# Altium PCB mega128PCB.PcbDoc (part 2 of 3)
Units mm, origin at the board's own origin, x right, y up, seen from the top; angles counter-clockwise.
Board outline 152.4 x 101.6 mm, 2 copper layers (Top Layer, Bottom Layer); 70 components, 96 nets, 393 pads, 80 vias.
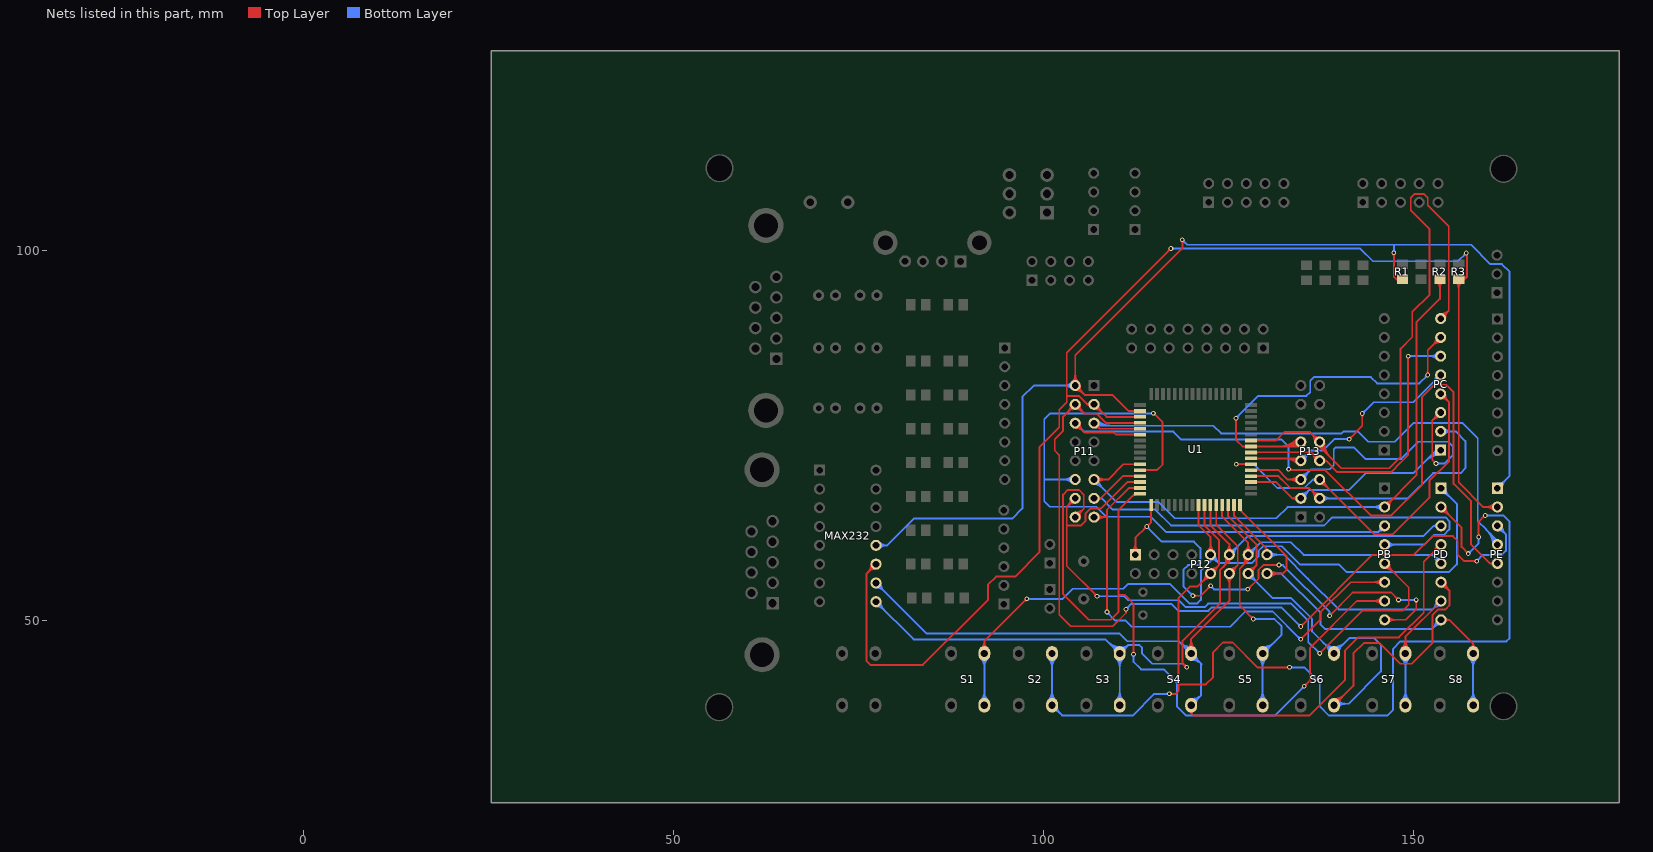
[diagram p2: the nets of this part, all layers, seen from the top]

## Via types
v1: diameter 0.635, hole 0.356, Top Layer to Bottom Layer, 80 vias

## Nets (pads, with @x,y where several pads share a name; then routed paths per layer and width w, separated by ;. In a path a pad name is that pad's centre, name@x,y a point inside that pad or via, vN(x,y) a via of type N, cw(c..) or ccw(c..) an arc to the next point about the centre after c; other vN are vias at no path point) (continued)
PB1: P11.11 PB.2 R2.1 U1.11 | length 100.5
  Top Layer w0.254: P11.11@106.858,69.088 108.756,69.088 110.82,71.152 U1.11@113.074,71.152 ; P11.11@107.119,68.827 cw(c107.749,68.197) 107.749,69.088 cw(c107.749,69.979) P11.11@107.119,69.349 ; P11.11@107.298,68.647 cw(c108.362,67.584) 108.362,69.088 cw(c108.362,70.592) P11.11@107.298,69.529 ; U1.11@112.437,71.065 ccw(c112.227,70.855) 112.227,71.152 ccw(c112.227,71.449) U1.11@112.437,71.239 ; PB.2@146.124,65.374 150.419,69.669 150.419,90.322 153.594,93.497 R2.1@153.594,96.139 ; PB.2@146.124,65.743 ccw(c146.124,66.634) 146.754,66.004 ccw(c147.384,65.374) PB.2@146.493,65.374 ; PB.2@146.124,65.997 ccw(c146.124,67.501) 147.187,66.438 ccw(c148.251,65.374) PB.2@146.747,65.374 ; R2.1@153.224,95.769 cw(c152.331,94.876) 153.594,94.876 cw(c154.856,94.876) R2.1@153.964,95.769
  Bottom Layer w0.254: P11.11@106.858,68.465 cw(c106.858,66.961) 107.921,68.024 cw(c108.985,69.088) P11.11@107.481,69.088 ; P11.11@106.858,68.719 cw(c106.858,67.828) 107.488,68.458 cw(c108.118,69.088) P11.11@107.227,69.088 ; P11.11@106.858,69.088 109.907,66.038 115.597,66.038 117.78,63.856 131.496,63.856 133.014,65.374 PB.2@146.124,65.374 ; PB.2@145.683,64.933 ccw(c144.62,63.87) 144.62,65.374 ccw(c144.62,66.878) PB.2@145.683,65.815 ; PB.2@145.863,65.113 ccw(c145.233,64.483) 145.233,65.374 ccw(c145.233,66.265) PB.2@145.863,65.635
PB2: P11.12 PB.3 U1.12 | length 96.5
  Top Layer w0.254: U1.12@113.074,70.352 115.361,70.352 116.129,71.12 116.129,76.835 v1@114.935,78.029 ; U1.12@113.711,70.265 cw(c113.921,70.055) 113.921,70.352 cw(c113.921,70.649) U1.12@113.711,70.439 ; v1@114.884,77.838 cw(c114.884,77.256) 115.296,77.668 ; v1@115.075,78.029 ccw(c115.412,78.029) 115.173,77.79
  Bottom Layer w0.254: 100.127,69.088 P11.12@104.318,69.088 ; P11.12@103.877,68.647 ccw(c102.814,67.584) 102.814,69.088 ccw(c102.814,70.592) P11.12@103.877,69.529 ; P11.12@104.057,68.827 ccw(c103.427,68.197) 103.427,69.088 ccw(c103.427,69.979) P11.12@104.057,69.349 ; v1@114.749,77.894 ccw(c114.424,77.569) 114.424,78.029 ccw(c114.424,78.489) v1@114.749,78.164 ; v1(114.884,78.029) 100.94,78.029 100.127,77.216 100.127,66.167 100.889,65.405 107.163,65.405 108.504,64.064 114.536,64.064 114.988,63.612 115.001,63.612 116.637,61.976 145.266,61.976 ; PB.3@145.509,62.733 cw(c144.651,62.591) 145.266,61.976 ; PB.3@146.023,62.219 ccw(c145.881,61.361) 145.266,61.976 ; PB.3@146.124,62.834 145.266,61.976
PB3: P11.13 PB.4 U1.13 | length 74.5
  Top Layer w0.254: P11.13@106.858,66.548 107.74,66.548 ; P11.13@107.445,66.34 cw(c107.74,66.235) 107.74,66.548 ; P11.13@107.445,66.756 ccw(c107.74,66.861) 107.74,66.548 ; U1.13@112.437,69.465 ccw(c112.227,69.255) 112.227,69.552 ccw(c112.227,69.849) U1.13@112.437,69.639 ; U1.13@113.074,69.552 110.744,69.552 107.74,66.548
  Bottom Layer w0.254: P11.13@106.858,66.548 107.874,66.548 ; P11.13@107.413,66.265 cw(c107.874,66.031) 107.874,66.548 ; P11.13@107.413,66.831 ccw(c107.874,67.065) 107.874,66.548 ; PB.4@146.124,60.294 151.505,60.294 152.781,61.57 154.102,61.57 154.875,62.343 154.875,63.446 154.356,63.965 139.022,63.965 137.934,62.877 117.26,62.877 115.113,65.024 109.398,65.024 107.874,66.548 ; PB.4@146.385,60.033 cw(c147.015,59.403) 147.015,60.294 cw(c147.015,61.185) PB.4@146.385,60.555 ; PB.4@146.564,59.853 cw(c147.628,58.79) 147.628,60.294 cw(c147.628,61.798) PB.4@146.564,60.735
PB4: P11.14 PB.5 U1.14 | length 96.3
  Top Layer w0.254: 103.175,62.865 105.092,62.865 105.727,63.5 105.727,64.516 106.362,65.151 107.747,65.151 111.348,68.752 U1.14@113.074,68.752 ; P11.14@103.695,66.548 cw(c102.191,66.548) 103.254,65.484 cw(c104.318,64.421) P11.14@104.318,65.925 ; P11.14@103.949,66.548 cw(c103.058,66.548) 103.688,65.918 cw(c104.318,65.288) P11.14@104.318,66.179 ; P11.14@104.318,66.548 103.175,65.405 103.175,57.404 v1(107.264,53.315) ; v1@107.074,53.315 ccw(c106.614,53.315) 106.939,53.64 ccw(c107.264,53.965) v1@107.264,53.505 ; U1.14@112.437,68.665 ccw(c112.227,68.455) 112.227,68.752 ccw(c112.227,69.049) U1.14@112.437,68.839 ; v1(137.338,45.593) 143.154,51.41 148.628,51.41 149.377,52.159 149.377,54.5 PB.5@146.124,57.754 ; v1@137.338,45.783 ccw(c137.338,46.243) 137.663,45.918 ccw(c137.988,45.593) v1@137.528,45.593 ; PB.5@146.124,57.131 cw(c146.124,55.627) 147.187,56.69 cw(c148.251,57.754) PB.5@146.747,57.754 ; PB.5@146.124,57.385 cw(c146.124,56.494) 146.754,57.124 cw(c147.384,57.754) PB.5@146.493,57.754
  Bottom Layer w0.254: v1(107.264,53.315) 110.973,53.315 111.507,52.78 118.301,52.78 119.23,51.851 121.805,51.851 122.278,52.324 133.477,52.324 135.803,49.998 135.803,47.128 v1(137.338,45.593) ; v1@107.399,53.18 cw(c107.724,52.855) 107.724,53.315 cw(c107.724,53.775) v1@107.399,53.449 ; v1@137.147,45.593 ccw(c136.687,45.593) 137.013,45.918 ccw(c137.338,46.243) v1@137.338,45.783
PB5: P11.15 PB.6 U1.15 | length 76.6
  Top Layer w0.254: P11.15@106.858,64.008 108.585,64.008 108.61,63.983 ; P11.15@107.119,63.747 cw(c107.749,63.117) 107.749,64.008 cw(c107.749,64.899) P11.15@107.119,64.269 ; P11.15@107.298,63.567 cw(c108.362,62.504) 108.362,64.008 cw(c108.362,65.512) P11.15@107.298,64.449 ; v1@108.476,51.316 ccw(c108.15,51.641) 108.61,51.641 ccw(c109.07,51.641) v1@108.745,51.316 ; v1(108.61,51.181) 108.61,64.973 111.589,67.952 U1.15@113.074,67.952 ; U1.15@112.437,67.865 ccw(c112.227,67.655) 112.227,67.952 ccw(c112.227,68.249) U1.15@112.437,68.039 ; v1(134.772,47.498) 137.431,50.157 137.431,51.126 141.519,55.214 PB.6@146.124,55.214 ; v1@134.772,47.688 ccw(c134.772,48.148) 135.098,47.823 ccw(c135.423,47.498) v1@134.963,47.498 ; PB.6@145.683,54.773 ccw(c144.62,53.71) 144.62,55.214 ccw(c144.62,56.718) PB.6@145.683,55.655 ; PB.6@145.863,54.953 ccw(c145.233,54.323) 145.233,55.214 ccw(c145.233,56.105) PB.6@145.863,55.475
  Bottom Layer w0.254: v1@108.61,50.99 cw(c108.61,50.531) 108.936,50.856 cw(c109.261,51.181) v1@108.801,51.181 ; v1(108.61,51.181) 109.753,50.038 111.12,50.038 111.957,49.201 125.249,49.201 127.305,51.257 130.988,51.257 134.747,47.498 v1(134.772,47.498) ; 134.404,47.841 ccw(c134.772,48.21) v1@134.772,47.688 ; 134.465,47.78 cw(c134.183,47.498) v1@134.582,47.498
PB6: P11.16 PB.7 U1.16 | length 116.6
  Top Layer w0.254: P11.16@104.318,64.008 105.461,65.151 105.461,67.056 104.826,67.691 103.302,67.691 102.667,67.056 102.667,53.594 106.121,50.14 109.144,50.14 110.16,51.156 110.16,64.942 112.37,67.152 112.522,67.152 U1.16@113.074,67.152 ; P11.16@104.318,64.377 ccw(c104.318,65.268) 104.948,64.638 ccw(c105.578,64.008) P11.16@104.687,64.008 ; P11.16@104.318,64.631 ccw(c104.318,66.135) 105.381,65.072 ccw(c106.445,64.008) P11.16@104.941,64.008 ; 110.16,53.34 110.287,53.467 ; 110.16,53.467 111.049,53.467 112.192,52.324 v1(112.192,45.491) ; 112.051,66.833 cw(c112.524,66.36) U1.16@112.524,67.029 ; v1@112.057,45.626 ccw(c111.732,45.951) 112.192,45.951 ccw(c112.652,45.951) v1@112.327,45.626 ; v1(135.255,41.148) 136.017,41.91 136.017,46.304 142.387,52.674 PB.7@146.124,52.674 ; v1@135.255,41.338 ccw(c135.255,41.798) 135.58,41.473 ccw(c135.905,41.148) v1@135.445,41.148 ; 136.017,46.228 136.068,46.228 ; PB.7@145.683,52.233 ccw(c144.62,51.17) 144.62,52.674 ccw(c144.62,54.178) PB.7@145.683,53.115 ; PB.7@145.863,52.413 ccw(c145.233,51.783) 145.233,52.674 ccw(c145.233,53.565) PB.7@145.863,52.935
  Bottom Layer w0.254: v1@112.057,45.357 cw(c111.732,45.031) 112.192,45.031 cw(c112.652,45.031) v1@112.327,45.357 ; v1(112.192,45.491) 112.192,44.45 113.208,43.434 116.281,43.434 118.059,41.656 118.059,38.43 119.304,37.186 131.293,37.186 v1(135.255,41.148) ; v1@135.064,41.148 cw(c134.605,41.148) 134.93,40.823 cw(c135.255,40.498) v1@135.255,40.957
PB7: P12.1 PB.8 U1.17 | length 89.1
  Top Layer w0.254: P12.1@112.005,59.369 ccw(c110.942,60.432) 112.446,60.432 ccw(c113.95,60.432) P12.1@112.886,59.369 ; P12.1@112.185,59.189 ccw(c111.555,59.819) 112.446,59.819 ccw(c113.337,59.819) P12.1@112.707,59.189 ; P12.1@112.446,58.928 112.446,61.214 113.97,62.738 v1(113.995,62.738) 114.574,63.317 U1.17@114.574,65.652 ; 113.627,62.395 cw(c113.995,62.026) v1@113.995,62.547 ; 113.688,62.456 ccw(c113.406,62.738) v1@113.805,62.738 ; v1@113.995,62.928 ccw(c113.995,63.388) 114.32,63.063 ccw(c114.646,62.738) v1@114.186,62.738 ; U1.17@114.487,65.015 cw(c114.277,64.805) 114.574,64.805 cw(c114.871,64.805) U1.17@114.661,65.015 ; v1(120.218,53.391) 121.26,53.391 v1(122.606,54.737) ; v1@120.353,53.256 cw(c120.678,52.931) 120.678,53.391 cw(c120.678,53.851) v1@120.353,53.526 ; v1@122.415,54.737 cw(c121.955,54.737) 122.281,54.412 cw(c122.606,54.087) v1@122.606,54.546 ; v1(127.635,54.254) 129.083,55.702 129.083,56.896 129.718,57.531 v1(131.851,57.531) ; v1@127.635,54.445 ccw(c127.635,54.905) 127.96,54.58 ccw(c128.285,54.254) v1@127.825,54.254 ; v1@131.717,57.396 ccw(c131.391,57.071) 131.391,57.531 ccw(c131.391,57.991) v1@131.717,57.666 ; v1(138.684,50.698) 141.808,53.823 146.99,53.823 v1(147.993,52.819) ; v1@138.684,50.889 ccw(c138.684,51.349) 139.009,51.024 ccw(c139.334,50.698) v1@138.874,50.698 ; PB.8@146.124,50.134 148.978,50.134 150.393,51.549 v1(150.393,52.819) ; PB.8@146.385,49.873 cw(c147.015,49.243) 147.015,50.134 cw(c147.015,51.025) PB.8@146.385,50.395 ; PB.8@146.564,49.693 cw(c147.628,48.63) 147.628,50.134 cw(c147.628,51.638) PB.8@146.564,50.575 ; v1@147.803,52.819 ccw(c147.343,52.819) 147.668,53.145 ccw(c147.993,53.47) v1@147.993,53.01 ; v1@150.259,52.685 cw(c149.933,52.359) 150.393,52.359 cw(c150.853,52.359) v1@150.528,52.685
  Bottom Layer w0.254: v1@113.995,62.547 cw(c113.995,62.149) 114.277,62.431 ; v1(113.995,62.738) 113.995,62.713 116.002,60.706 120.345,60.706 121.234,59.817 121.234,57.81 120.955,57.531 119.558,57.531 118.923,56.896 118.923,54.686 v1(120.218,53.391) ; v1@114.186,62.738 ccw(c114.707,62.738) 114.338,62.369 ; v1@120.028,53.391 ccw(c119.568,53.391) 119.893,53.716 ccw(c120.218,54.041) v1@120.218,53.581 ; v1@122.606,54.546 cw(c122.606,54.087) 122.931,54.412 cw(c123.256,54.737) v1@122.796,54.737 ; v1(122.606,54.737) 123.088,54.254 v1(127.635,54.254) ; v1@127.5,54.12 ccw(c127.175,53.794) 127.175,54.254 ccw(c127.175,54.714) v1@127.5,54.389 ; v1(131.851,57.531) 132.385,57.531 138.684,51.232 v1(138.684,50.698) ; v1@131.986,57.396 cw(c132.311,57.071) 132.311,57.531 cw(c132.311,57.991) v1@131.986,57.666 ; v1@138.549,50.833 ccw(c138.224,51.158) 138.684,51.158 ccw(c139.144,51.158) v1@138.819,50.833 ; v1(147.993,52.819) v1(150.393,52.819) ; v1@148.128,52.685 cw(c148.453,52.359) 148.453,52.819 cw(c148.453,53.279) v1@148.128,52.954 ; v1@150.259,52.685 ccw(c149.933,52.359) 149.933,52.819 ccw(c149.933,53.279) v1@150.259,52.954
PC0: P13.3 PC.1 U1.35 | length 41.2
  Top Layer w0.254: U1.35@128.074,68.752 131.451,68.752 133.655,66.548 ; U1.35@128.711,68.665 cw(c128.921,68.455) 128.921,68.752 cw(c128.921,69.049) U1.35@128.711,68.839 ; P13.3@134.274,66.21 ccw(c133.655,65.811) 133.655,66.548 ; P13.3@134.274,66.886 cw(c133.655,67.285) 133.655,66.548 ; P13.3@134.798,66.548 133.655,66.548
  Bottom Layer w0.254: P13.3@134.798,66.548 135.941,67.691 141.351,67.691 143.637,69.977 150.038,69.977 153.117,73.056 PC.1@153.698,73.056 ; P13.3@134.798,66.917 ccw(c134.798,67.808) 135.428,67.178 ccw(c136.058,66.548) P13.3@135.167,66.548 ; P13.3@134.798,67.171 ccw(c134.798,68.675) 135.861,67.612 ccw(c136.925,66.548) P13.3@135.421,66.548 ; 151.642,71.582 cw(c153.698,69.526) PC.1@153.698,72.433 ; 152.076,72.015 cw(c153.698,70.393) PC.1@153.698,72.687 ; 152.51,72.449 cw(c153.698,71.261) PC.1@153.698,72.941 ; 152.943,72.882 cw(c153.698,72.128) PC.1@153.698,73.195
PC1: P13.4 PC.2 U1.36 | length 51.2
  Top Layer w0.254: U1.36@128.074,69.552 131.78,69.552 132.244,69.088 132.258,69.088 133.401,67.945 135.941,67.945 P13.4@137.338,66.548 ; U1.36@128.711,69.465 cw(c128.921,69.255) 128.921,69.552 cw(c128.921,69.849) U1.36@128.711,69.639 ; P13.4@136.715,66.548 ccw(c135.211,66.548) 136.274,67.612 ccw(c137.338,68.675) P13.4@137.338,67.171 ; P13.4@136.969,66.548 ccw(c136.078,66.548) 136.708,67.178 ccw(c137.338,67.808) P13.4@137.338,66.917
  Bottom Layer w0.254: P13.4@137.338,66.548 149.276,66.548 152.679,69.952 156.388,69.952 157.048,70.612 157.048,74.27 155.722,75.596 PC.2@153.698,75.596 ; P13.4@137.599,66.287 cw(c138.229,65.657) 138.229,66.548 cw(c138.229,67.439) P13.4@137.599,66.809 ; P13.4@137.778,66.107 cw(c138.842,65.044) 138.842,66.548 cw(c138.842,68.052) P13.4@137.778,66.989 ; PC.2@153.959,75.335 cw(c154.589,74.705) 154.589,75.596 cw(c154.589,76.487) PC.2@153.959,75.857 ; PC.2@154.138,75.155 cw(c155.202,74.092) 155.202,75.596 cw(c155.202,77.1) PC.2@154.138,76.037
PC2: P13.5 PC.3 U1.37 | length 57.5
  Top Layer w0.254: U1.37@128.074,70.352 131.786,70.352 132.288,69.85 132.288,69.82 133.02,69.088 P13.5@134.798,69.088 ; U1.37@128.711,70.265 cw(c128.921,70.055) 128.921,70.352 cw(c128.921,70.649) U1.37@128.711,70.439 ; P13.5@134.357,68.647 ccw(c133.294,67.584) 133.294,69.088 ccw(c133.294,70.592) P13.5@134.357,69.529 ; P13.5@134.537,68.827 ccw(c133.907,68.197) 133.907,69.088 ccw(c133.907,69.979) P13.5@134.537,69.349 ; 152.516,77.027 cw(c153.689,75.854) PC.3@153.695,77.513 ; 152.686,77.197 ccw(c151.747,78.136) PC.3@153.075,78.136 ; v1@152.87,71.247 ccw(c152.41,71.247) 152.735,71.572 ccw(c153.06,71.897) v1@153.06,71.438 ; 152.947,77.458 cw(c153.692,76.713) PC.3@153.696,77.767 ; v1(153.06,71.247) 152.552,71.755 152.552,77.064 153.625,78.136 PC.3@153.698,78.136 ; 153.119,77.631 ccw(c152.614,78.136) PC.3@153.329,78.136
  Bottom Layer w0.254: P13.5@134.798,69.088 136.195,70.485 138.735,70.485 139.242,70.993 139.242,73.152 139.522,73.431 141.98,73.431 143.529,71.882 148.387,71.882 150.692,74.187 154.718,74.187 155.372,73.533 155.372,72.45 154.168,71.247 v1(153.06,71.247) ; P13.5@134.798,69.457 ccw(c134.798,70.348) 135.428,69.718 ccw(c136.058,69.088) P13.5@135.167,69.088 ; P13.5@134.798,69.711 ccw(c134.798,71.215) 135.861,70.152 ccw(c136.925,69.088) P13.5@135.421,69.088 ; v1@153.195,71.112 cw(c153.52,70.787) 153.52,71.247 cw(c153.52,71.707) v1@153.195,71.382
PC3: P13.6 PC.4 U1.38 | length 60.9
  Top Layer w0.254: v1(126.067,71.152) U1.38@128.074,71.152 ; v1@126.202,71.017 cw(c126.527,70.692) 126.527,71.152 cw(c126.527,71.612) v1@126.202,71.287 ; U1.38@127.437,71.065 ccw(c127.227,70.855) 127.227,71.152 ccw(c127.227,71.449) U1.38@127.437,71.239 ; P13.6@137.338,68.465 cw(c137.338,66.961) 138.401,68.024 cw(c139.465,69.088) P13.6@137.961,69.088 ; P13.6@137.338,68.719 cw(c137.338,67.828) 137.968,68.458 cw(c138.598,69.088) P13.6@137.707,69.088 ; P13.6@137.338,69.088 144.729,61.697 147.244,61.697 152.171,66.624 152.171,68.91 154.838,71.577 154.838,79.535 PC.4@153.698,80.676 ; PC.4@153.698,80.053 cw(c153.698,78.549) 154.761,79.612 cw(c155.825,80.676) PC.4@154.321,80.676 ; PC.4@153.698,80.307 cw(c153.698,79.416) 154.328,80.046 cw(c154.958,80.676) PC.4@154.067,80.676
  Bottom Layer w0.254: v1(126.067,71.152) 128.416,71.152 131.623,67.945 135.294,67.945 136.437,69.088 ; v1@126.202,71.017 cw(c126.527,70.692) 126.527,71.152 cw(c126.527,71.612) v1@126.202,71.287 ; P13.6@136.755,68.868 ccw(c136.437,68.748) 136.437,69.088 ; P13.6@136.755,69.308 cw(c136.437,69.428) 136.437,69.088 ; P13.6@137.338,69.088 136.437,69.088
PC4: P13.7 PC.5 U1.39 | length 47.4
  Top Layer w0.254: U1.39@128.074,71.952 134.474,71.952 P13.7@134.798,71.628 ; U1.39@128.711,71.865 cw(c128.921,71.655) 128.921,71.952 cw(c128.921,72.249) U1.39@128.711,72.039 ; 132.512,71.952 cw(c132.512,69.342) P13.7@134.357,71.187 ; 133.125,71.952 cw(c133.125,69.955) P13.7@134.537,71.367 ; 133.738,71.952 cw(c133.738,70.568) P13.7@134.716,71.547 ; 134.076,71.952 ccw(c134.076,72.35) P13.7@134.357,72.069 ; v1(141.326,74.549) 143.104,76.327 v1(143.104,78.003) ; v1@141.326,74.739 ccw(c141.326,75.199) 141.651,74.874 ccw(c141.976,74.549) v1@141.516,74.549 ; v1@142.969,77.869 cw(c142.644,77.543) 143.104,77.543 cw(c143.564,77.543) v1@143.238,77.869
  Bottom Layer w0.254: P13.7@134.798,71.628 136.195,73.025 137.82,73.025 139.344,74.549 v1(141.326,74.549) ; P13.7@134.798,71.997 ccw(c134.798,72.888) 135.428,72.258 ccw(c136.058,71.628) P13.7@135.167,71.628 ; P13.7@134.798,72.251 ccw(c134.798,73.755) 135.861,72.692 ccw(c136.925,71.628) P13.7@135.421,71.628 ; v1@141.191,74.414 ccw(c140.866,74.089) 140.866,74.549 ccw(c140.866,75.009) v1@141.191,74.684 ; v1(143.104,78.003) 144.628,79.527 150.009,79.527 PC.5@153.698,83.216 ; v1@143.104,78.194 ccw(c143.104,78.654) 143.429,78.329 ccw(c143.754,78.003) v1@143.294,78.003 ; PC.5@153.075,83.216 cw(c151.571,83.216) 152.634,82.152 cw(c153.698,81.089) PC.5@153.698,82.593 ; PC.5@153.329,83.216 cw(c152.438,83.216) 153.068,82.586 cw(c153.698,81.956) PC.5@153.698,82.847
PC5: P13.8 PC.6 U1.40 | length 52.2
  Top Layer w0.254: U1.40@128.074,72.752 128.93,72.752 128.949,72.771 ; U1.40@128.714,72.668 cw(c128.949,72.45) 128.949,72.771 ; 128.967,72.771 ccw(c128.967,72.409) 128.711,72.665 cw(c128.921,72.455) 128.921,72.752 cw(c128.921,73.049) U1.40@128.711,72.839 ; P13.8@136.715,71.628 ccw(c135.211,71.628) 136.274,72.692 ccw(c137.338,73.755) P13.8@137.338,72.251 ; P13.8@136.969,71.628 ccw(c136.078,71.628) 136.708,72.258 ccw(c137.338,72.888) P13.8@137.338,71.997 ; P13.8@137.923,71.415 cw(c138.227,71.305) 138.227,71.628 ; P13.8@137.923,71.841 ccw(c138.227,71.951) 138.227,71.628 ; v1@149.166,85.621 cw(c148.841,85.296) 149.301,85.296 cw(c149.761,85.296) v1@149.436,85.621 ; v1(149.301,85.756) 149.301,72.408 148.267,71.374 148.26,71.374 146.99,70.104 139.751,70.104 138.227,71.628 ; U1.40@128.711,72.839 ccw(c128.875,73.003) 128.875,72.771 cw(c128.875,73.003) U1.40@128.711,72.839 ; 128.949,72.771 136.195,72.771 P13.8@137.338,71.628 138.227,71.628
  Bottom Layer w0.254: v1(149.301,85.756) PC.6@153.698,85.756 ; v1@149.436,85.621 cw(c149.761,85.296) 149.761,85.756 cw(c149.761,86.216) v1@149.436,85.891 ; PC.6@153.257,85.315 ccw(c152.194,84.252) 152.194,85.756 ccw(c152.194,87.26) PC.6@153.257,86.197 ; PC.6@153.437,85.495 ccw(c152.807,84.865) 152.807,85.756 ccw(c152.807,86.647) PC.6@153.437,86.017
PC6: P13.9 PC.7 U1.41 | length 65.7
  Top Layer w0.254: v1@125.9,77.234 cw(c125.575,76.908) 126.035,76.908 cw(c126.495,76.908) v1@126.17,77.234 ; v1(126.035,77.368) 126.035,74.441 126.924,73.552 U1.41@128.074,73.552 134.182,73.552 ; U1.41@127.437,73.465 ccw(c127.227,73.255) 127.227,73.552 ccw(c127.227,73.849) U1.41@127.437,73.639 ; U1.41@128.711,73.465 cw(c128.921,73.255) 128.921,73.552 cw(c128.921,73.849) U1.41@128.711,73.639 ; 131.807,73.552 ccw(c131.807,77.159) P13.9@134.357,74.609 ; 132.42,73.552 ccw(c132.42,76.546) P13.9@134.537,74.429 ; 133.033,73.552 ccw(c133.033,75.933) P13.9@134.716,74.249 ; 133.646,73.552 ccw(c133.646,75.32) P13.9@134.896,74.07 ; P13.9@134.239,73.894 cw(c133.971,73.762) 134.182,73.552 ; 134.259,73.552 ccw(c134.259,74.706) P13.9@135.076,73.89 ; P13.9@134.523,73.609 ccw(c134.392,73.342) 134.182,73.552 ; P13.9@134.798,74.168 134.182,73.552 ; v1@151.808,83.345 ccw(c151.483,83.67) 151.943,83.67 ccw(c152.403,83.67) v1@152.078,83.345 ; v1(151.943,83.21) 151.943,86.541 PC.7@153.698,88.296 ; PC.7@153.075,88.296 cw(c151.571,88.296) 152.634,87.232 cw(c153.698,86.169) PC.7@153.698,87.673 ; PC.7@153.329,88.296 cw(c152.438,88.296) 153.068,87.666 cw(c153.698,87.036) PC.7@153.698,87.927
  Bottom Layer w0.254: v1(126.035,77.368) 129.057,80.391 135.56,80.391 136.068,80.899 136.068,82.411 136.576,82.919 144.276,82.919 145.11,82.085 150.817,82.085 v1(151.943,83.21) ; v1@126.035,77.559 ccw(c126.035,78.019) 126.36,77.694 ccw(c126.685,77.368) v1@126.225,77.368 ; v1@151.752,83.21 cw(c151.292,83.21) 151.618,82.885 cw(c151.943,82.56) v1@151.943,83.02
PC7: P13.10 PC.8 U1.42 | length 96.8
  Top Layer w0.254: U1.42@128.074,74.352 131.433,74.352 132.596,75.514 135.992,75.514 P13.10@137.338,74.168 137.338,73.533 140.259,70.612 146.736,70.612 148.285,72.161 148.285,86.772 149.86,88.347 149.86,91.745 152.197,94.082 152.197,102.921 149.657,105.461 149.657,107.188 150.165,107.696 151.435,107.696 151.943,107.188 151.943,106.172 154.788,103.327 154.788,91.926 PC.8@153.698,90.836 ; U1.42@128.711,74.265 cw(c128.921,74.055) 128.921,74.352 cw(c128.921,74.649) U1.42@128.711,74.439 ; P13.10@136.715,74.168 ccw(c135.211,74.168) 136.274,75.232 ccw(c137.338,76.295) P13.10@137.338,74.791 ; P13.10@136.969,74.168 ccw(c136.078,74.168) 136.708,74.798 ccw(c137.338,75.428) P13.10@137.338,74.537 ; P13.10@137.199,74.168 ccw(c138.396,74.168) 137.55,73.321 ; P13.10@137.453,74.168 ccw(c139.263,74.168) 137.983,72.888 ; P13.10@137.707,74.168 ccw(c140.131,74.168) 138.417,72.454 ; P13.10@137.961,74.168 ccw(c140.998,74.168) 138.85,72.02 ; PC.8@153.698,91.205 ccw(c153.698,92.096) 154.328,91.466 ccw(c154.958,90.836) PC.8@154.067,90.836 ; PC.8@153.698,91.459 ccw(c153.698,92.963) 154.761,91.9 ccw(c155.825,90.836) PC.8@154.321,90.836
PD0: P12.9 PD.1 S1.2 U1.25 | length 130.3
  Top Layer w0.254: S1.2@91.605,46.299 ccw(c90.817,47.233) 92.039,47.233 ; S1.2@91.769,46.105 ccw(c91.278,46.687) 92.039,46.687 ccw(c92.8,46.687) S1.2@92.309,46.105 ; S1.2@92.039,45.585 92.039,47.233 ; S1.2@92.473,46.299 cw(c93.261,47.233) 92.039,47.233 ; v1@97.574,52.959 cw(c97.114,52.959) 97.439,52.634 cw(c97.765,52.309) v1@97.765,52.768 ; v1(97.765,52.959) 92.039,47.233 ; U1.25@120.887,65.015 cw(c120.677,64.805) 120.974,64.805 cw(c121.271,64.805) U1.25@121.061,65.015 ; U1.25@120.974,65.652 120.974,62.941 122.606,61.309 P12.9@122.606,58.928 ; P12.9@122.165,59.369 ccw(c121.102,60.432) 122.606,60.432 ccw(c124.11,60.432) P12.9@123.046,59.369 ; P12.9@122.345,59.189 ccw(c121.715,59.819) 122.606,59.819 ccw(c123.497,59.819) P12.9@122.867,59.189
  Bottom Layer w0.254: S1.2@91.563,39.261 ccw(c90.414,40.41) 92.039,40.41 ccw(c93.664,40.41) S1.2@92.515,39.261 ; S1.2@91.563,44.909 cw(c90.414,43.76) 92.039,43.76 cw(c93.664,43.76) S1.2@92.515,44.909 ; S1.2@91.743,39.081 ccw(c91.027,39.797) 92.039,39.797 ccw(c93.051,39.797) S1.2@92.335,39.081 ; S1.2@91.743,45.089 cw(c91.027,44.373) 92.039,44.373 cw(c93.051,44.373) S1.2@92.335,45.089 ; S1.2@92.039,38.585 S1.2@92.039,45.585 ; v1(97.765,52.959) 102.616,52.959 103.988,54.331 110.795,54.331 111.455,54.991 117.106,54.991 119.738,52.359 120.828,52.359 121.297,52.828 121.297,56.742 122.606,58.051 ; v1@97.899,52.824 cw(c98.225,52.499) 98.225,52.959 cw(c98.225,53.419) v1@97.899,53.094 ; P12.9@122.401,58.34 cw(c122.3,58.051) 122.606,58.051 ; P12.9@122.606,58.305 cw(c122.606,56.801) 123.669,57.864 cw(c124.733,58.928) P12.9@123.229,58.928 ; P12.9@122.606,58.559 cw(c122.606,57.668) 123.236,58.298 cw(c123.866,58.928) P12.9@122.975,58.928 ; P12.9@122.811,58.34 ccw(c122.912,58.051) 122.606,58.051 ; PD.1@153.744,67.291 cw(c153.744,65.787) 154.807,66.85 cw(c155.871,67.914) PD.1@154.367,67.914 ; PD.1@153.744,67.545 cw(c153.744,66.654) 154.374,67.284 cw(c155.004,67.914) PD.1@154.113,67.914 ; PD.1@153.744,67.914 155.397,66.261 155.405,66.261 155.88,65.786 155.88,57.633 154.864,56.617 140.945,56.617 139.929,57.633 134.671,57.633 132.232,60.071 129.718,60.071 129.083,59.436 129.083,58.699 128.168,57.785 123.749,57.785 P12.9@122.606,58.928 122.606,58.051
PD1: P12.10 PD.2 S2.2 U1.26 | length 181.7
  Top Layer w0.254: v1(117.043,40.132) 117.907,40.132 118.29,40.515 118.29,53.093 119.808,54.611 120.829,54.611 P12.10@122.606,56.388 123.737,57.519 123.737,60.947 121.774,62.91 U1.26@121.774,65.652 ; v1@117.178,39.997 cw(c117.503,39.672) 117.503,40.132 cw(c117.503,40.592) v1@117.178,40.267 ; 118.29,41.402 121.971,41.402 122.943,42.375 122.943,45.753 124.257,47.066 125.578,47.066 128.93,43.713 v1(133.274,43.713) ; U1.26@121.687,65.015 cw(c121.477,64.805) 121.774,64.805 cw(c122.071,64.805) U1.26@121.861,65.015 ; P12.10@121.983,56.388 cw(c120.479,56.388) 121.542,55.324 cw(c122.606,54.261) P12.10@122.606,55.765 ; P12.10@122.237,56.388 cw(c121.346,56.388) 121.976,55.758 cw(c122.606,55.128) P12.10@122.606,56.019 ; P12.10@122.606,56.757 ccw(c122.606,57.648) 123.236,57.018 ccw(c123.866,56.388) P12.10@122.975,56.388 ; P12.10@122.606,57.011 ccw(c122.606,58.515) 123.669,57.452 ccw(c124.733,56.388) P12.10@123.229,56.388 ; v1@133.139,43.579 ccw(c132.814,43.253) 132.814,43.713 ccw(c132.814,44.173) v1@133.139,43.848 ; PD.2@153.744,64.751 cw(c153.744,63.247) 154.807,64.31 cw(c155.871,65.374) PD.2@154.367,65.374 ; PD.2@153.744,65.005 cw(c153.744,64.114) 154.374,64.744 cw(c155.004,65.374) PD.2@154.113,65.374 ; PD.2@153.744,65.374 156.515,62.603 156.515,59.995 v1(157.429,59.08) ; v1@157.239,59.08 ccw(c156.779,59.08) 157.104,59.406 ccw(c157.429,59.731) v1@157.429,59.271 ; v1@158.691,61.45 ccw(c158.366,61.776) 158.826,61.776 ccw(c159.286,61.776) v1@158.961,61.45 ; v1(158.826,61.316) 158.826,63.398 159.664,64.237 v1(159.741,64.237) ; 159.285,63.858 cw(c159.741,63.402) v1@159.741,64.046 ; 159.469,64.041 ccw(c159.274,64.237) v1@159.55,64.237
  Bottom Layer w0.254: S2.2@100.707,39.261 ccw(c99.558,40.41) 101.183,40.41 ccw(c102.808,40.41) S2.2@101.659,39.261 ; S2.2@100.707,44.909 cw(c99.558,43.76) 101.183,43.76 cw(c102.808,43.76) S2.2@101.659,44.909 ; S2.2@100.887,39.081 ccw(c100.171,39.797) 101.183,39.797 ccw(c102.195,39.797) S2.2@101.479,39.081 ; S2.2@100.887,45.089 cw(c100.171,44.373) 101.183,44.373 cw(c102.195,44.373) S2.2@101.479,45.089 ; S2.2@101.183,45.585 101.183,38.568 102.54,37.211 ; S2.2@101.186,37.966 cw(c101.195,36.543) 102.202,37.549 cw(c103.039,38.385) S2.2@101.856,38.385 ; 102.54,37.186 112.065,37.186 115.011,40.132 v1(117.043,40.132) ; v1@116.908,39.997 ccw(c116.583,39.672) 116.583,40.132 ccw(c116.583,40.592) v1@116.908,40.267 ; v1(133.274,43.713) 135.28,43.713 137.363,41.631 137.363,38.43 138.608,37.186 146.456,37.186 147.269,37.998 147.269,46.228 148.26,47.219 162.585,47.219 163.017,47.65 163.017,63.373 162.154,64.237 v1(159.741,64.237) ; v1@133.409,43.579 cw(c133.734,43.253) 133.734,43.713 cw(c133.734,44.173) v1@133.409,43.848 ; v1(157.429,59.08) 158.826,60.477 v1(158.826,61.316) ; v1@157.429,59.271 ccw(c157.429,59.731) 157.754,59.406 ccw(c158.08,59.08) v1@157.62,59.08 ; v1@158.691,61.181 cw(c158.366,60.856) 158.826,60.856 cw(c159.286,60.856) v1@158.961,61.181 ; v1@159.875,64.102 cw(c160.201,63.777) 160.201,64.237 cw(c160.201,64.697) v1@159.875,64.371
PD2: MAX232.9 P12.11 PD.3 S3.2 U1.27 | length 145.5
  Top Layer w0.254: v1@119.189,43.713 ccw(c118.73,43.713) 119.055,44.039 ccw(c119.38,44.364) v1@119.38,43.904 ; v1(119.38,43.713) 118.798,44.295 118.798,47.238 123.876,52.316 123.876,56.82 125.146,58.09 ; U1.27@122.487,65.015 cw(c122.277,64.805) 122.574,64.805 cw(c122.871,64.805) U1.27@122.661,65.015 ; U1.27@122.574,65.652 122.574,62.933 125.146,60.361 ; 124.295,57.239 ccw(c123.368,58.166) P12.11@124.573,58.683 ; 124.56,57.504 ccw(c123.739,58.325) P12.11@124.807,58.783 ; P12.11@124.721,59.384 ccw(c123.81,60.361) 125.146,60.361 ; 124.826,57.77 ccw(c124.111,58.485) P12.11@125.04,58.883 ; P12.11@124.894,59.198 ccw(c124.355,59.777) 125.146,59.777 ccw(c125.937,59.777) P12.11@125.397,59.198 ; P12.11@124.966,58.331 cw(c124.893,58.09) 125.146,58.09 ; 125.091,58.035 ccw(c124.482,58.644) P12.11@125.274,58.983 ; P12.11@125.325,58.331 ccw(c125.398,58.09) 125.146,58.09 ; P12.11@125.571,59.384 cw(c126.482,60.361) 125.146,60.361 ; 125.146,58.09 P12.11@125.146,58.928 125.146,60.361
  Bottom Layer w0.254: MAX232.9@77.394,51.955 cw(c77.394,50.451) 78.457,51.514 cw(c79.521,52.578) MAX232.9@78.017,52.578 ; MAX232.9@77.394,52.209 cw(c77.394,51.318) 78.024,51.948 cw(c78.654,52.578) MAX232.9@77.763,52.578 ; MAX232.9@77.394,52.578 82.474,47.498 108.382,47.498 110.295,45.585 S3.2@110.327,45.585 ; 108.782,47.098 ccw(c110.327,48.643) S3.2@110.327,46.458 ; 109.215,46.664 ccw(c110.327,47.776) S3.2@110.327,46.204 ; 109.342,46.538 cw(c108.59,45.785) S3.2@109.654,45.785 ; 109.649,46.231 ccw(c110.327,46.909) S3.2@110.327,45.95 ; S3.2@109.851,39.261 ccw(c108.702,40.41) 110.327,40.41 ccw(c111.952,40.41) S3.2@110.803,39.261 ; S3.2@109.851,44.909 cw(c108.702,43.76) 110.327,43.76 cw(c111.952,43.76) S3.2@110.803,44.909 ; S3.2@110.031,39.081 ccw(c109.315,39.797) 110.327,39.797 ccw(c111.339,39.797) S3.2@110.623,39.081 ; S3.2@110.031,45.089 cw(c109.315,44.373) 110.327,44.373 cw(c111.339,44.373) S3.2@110.623,45.089 ; S3.2@110.327,38.585 S3.2@110.327,45.585 ; S3.2@110.424,46.193 ccw(c110.6,46.931) 111.136,46.394 ; S3.2@110.483,46.44 ccw(c110.723,47.45) 111.458,46.716 ; S3.2@111,45.785 cw(c112.142,45.785) 111.334,46.592 ; v1@119.189,43.713 ccw(c118.73,43.713) 119.055,44.039 ccw(c119.38,44.364) v1@119.38,43.904 ; v1(119.38,43.713) 118.889,44.204 114.732,44.204 113.316,45.62 113.316,46.399 113,46.716 111.458,46.716 ; P12.11@125.146,58.928 127.66,61.443 151.367,61.443 152.758,62.834 ; P12.11@125.146,59.297 ccw(c125.146,60.188) 125.776,59.558 ccw(c126.406,58.928) P12.11@125.515,58.928 ; P12.11@125.146,59.551 ccw(c125.146,61.055) 126.209,59.992 ccw(c127.273,58.928) P12.11@125.769,58.928 ; PD.3@153.181,62.567 ccw(c152.758,62.365) 152.758,62.834 ; PD.3@153.181,63.101 cw(c152.758,63.303) 152.758,62.834 ; PD.3@153.744,62.834 152.758,62.834 ; S3.2@110.327,45.585 111.458,46.716
PD3: MAX232.10 P12.12 PD.4 S4.2 U1.28 | length 161.8
  Top Layer w0.254: S4.2@119.503,46.261 ccw(c118.354,47.41) 119.979,47.41 ccw(c121.604,47.41) S4.2@120.455,46.261 ; S4.2@119.683,46.081 ccw(c118.967,46.797) 119.979,46.797 ccw(c120.991,46.797) S4.2@120.275,46.081 ; S4.2@119.979,38.585 119.979,37.526 ; S4.2@119.979,45.585 119.979,47.55 125.146,52.717 P12.12@125.146,56.388 126.277,57.519 126.277,60.059 123.374,62.962 U1.28@123.374,65.652 ; U1.28@123.287,65.015 cw(c123.077,64.805) 123.374,64.805 cw(c123.671,64.805) U1.28@123.461,65.015 ; P12.12@124.705,55.947 cw(c123.642,54.884) 125.146,54.884 cw(c126.65,54.884) P12.12@125.586,55.947 ; P12.12@124.885,56.127 cw(c124.255,55.497) 125.146,55.497 cw(c126.037,55.497) P12.12@125.407,56.127 ; P12.12@125.146,56.757 ccw(c125.146,57.648) 125.776,57.018 ccw(c126.406,56.388) P12.12@125.515,56.388 ; P12.12@125.146,57.011 ccw(c125.146,58.515) 126.209,57.452 ccw(c127.273,56.388) P12.12@125.769,56.388 ; PD.4@153.121,60.294 cw(c151.617,60.294) 152.68,59.23 cw(c153.744,58.167) PD.4@153.744,59.671 ; PD.4@153.375,60.294 cw(c152.484,60.294) 153.114,59.664 cw(c153.744,59.034) PD.4@153.744,59.925 ; PD.4@153.744,60.294 151.409,57.96 151.409,51.103 148.059,47.752 142.545,47.752 140.767,45.974 140.767,41.986 135.966,37.186 120.32,37.186 119.979,37.526 ; 119.979,37.526 cw(c120.19,37.526) 120.14,37.731 ccw(c120.19,37.526) 119.979,37.526 ; 119.979,37.526 ccw(c119.768,37.526) 119.818,37.731 cw(c119.768,37.526) 119.979,37.526
  Bottom Layer w0.254: MAX232.10@77.394,54.495 cw(c77.394,52.991) 78.457,54.054 cw(c79.521,55.118) MAX232.10@78.017,55.118 ; MAX232.10@77.394,54.749 cw(c77.394,53.858) 78.024,54.488 cw(c78.654,55.118) MAX232.10@77.763,55.118 ; MAX232.10@77.394,55.118 84.252,48.26 110.325,48.26 111.341,47.244 118.288,47.244 119.947,45.585 S4.2@119.979,45.585 119.979,45.553 121.336,44.196 121.336,39.942 ; 118.434,47.098 ccw(c119.979,48.643) S4.2@119.979,46.458 ; 118.867,46.664 ccw(c119.979,47.776) S4.2@119.979,46.204 ; 118.994,46.538 cw(c118.242,45.785) S4.2@119.306,45.785 ; 119.301,46.231 ccw(c119.979,46.909) S4.2@119.979,45.95 ; S4.2@119.979,38.585 121.336,39.942 ; S4.2@119.979,44.712 cw(c119.979,42.682) 121.414,44.117 ; S4.2@119.979,44.966 cw(c119.979,43.549) 120.981,44.551 ; S4.2@120.01,39.203 ccw(c120.098,40.395) 120.944,39.55 ; S4.2@120.029,39.456 ccw(c120.152,41.125) 121.336,39.942 ; S4.2@120.652,38.785 cw(c121.794,38.785) 120.986,39.592 ; S4.2@120.652,45.385 ccw(c121.872,45.385) 121.009,44.523
PD4: P12.13 PD.5 S5.2 U1.29 | length 92.7
  Top Layer w0.254: U1.29@124.087,65.015 cw(c123.877,64.805) 124.174,64.805 cw(c124.471,64.805) U1.29@124.261,65.015 ; U1.29@124.174,65.652 124.174,64.081 127.686,60.569 127.686,58.19 126.543,57.047 126.543,52.07 v1(128.372,50.241) ; 126.912,57.416 ccw(c126.141,58.187) P12.13@127.124,58.659 ; 127.165,57.67 ccw(c126.484,58.351) P12.13@127.353,58.768 ; P12.13@127.245,59.369 ccw(c126.182,60.432) 127.686,60.432 ccw(c129.19,60.432) P12.13@128.126,59.369 ; 127.419,57.923 ccw(c126.826,58.516) P12.13@127.582,58.878 ; P12.13@127.425,59.189 ccw(c126.795,59.819) 127.686,59.819 ccw(c128.577,59.819) P12.13@127.947,59.189 ; 127.673,58.177 ccw(c127.169,58.68) P12.13@127.811,58.988 ; v1@128.181,50.241 ccw(c127.721,50.241) 128.046,50.566 ccw(c128.372,50.892) v1@128.372,50.432
  Bottom Layer w0.254: P12.13@127.686,58.928 129.37,60.612 133.469,60.612 135.179,58.903 152.595,58.903 PD.5@153.744,57.754 ; P12.13@127.686,59.297 ccw(c127.686,60.188) 128.316,59.558 ccw(c128.946,58.928) P12.13@128.055,58.928 ; P12.13@127.686,59.551 ccw(c127.686,61.055) 128.749,59.992 ccw(c129.813,58.928) P12.13@128.309,58.928 ; v1(128.372,50.241) 131.242,50.241 132.182,49.301 132.182,48.057 129.71,45.585 S5.2@129.631,45.585 S5.2@129.631,38.585 ; v1@128.506,50.106 cw(c128.832,49.781) 128.832,50.241 cw(c128.832,50.701) v1@128.506,50.376 ; S5.2@129.155,39.261 ccw(c128.006,40.41) 129.631,40.41 ccw(c131.256,40.41) S5.2@130.107,39.261 ; S5.2@129.155,44.909 cw(c128.006,43.76) 129.631,43.76 cw(c131.256,43.76) S5.2@130.107,44.909 ; S5.2@129.335,39.081 ccw(c128.619,39.797) 129.631,39.797 ccw(c130.643,39.797) S5.2@129.927,39.081 ; S5.2@129.335,45.089 cw(c128.619,44.373) 129.631,44.373 cw(c130.643,44.373) S5.2@129.927,45.089 ; S5.2@129.631,45.95 ccw(c129.631,47.022) 130.389,46.264 ; S5.2@129.631,46.204 ccw(c129.631,47.889) 130.822,46.697 ; S5.2@129.631,46.458 ccw(c129.631,48.756) 131.256,47.131 ; S5.2@130.304,45.785 cw(c131.256,45.785) 130.583,46.458 ; PD.5@153.121,57.754 ccw(c151.617,57.754) 152.68,58.818 ccw(c153.744,59.881) PD.5@153.744,58.377 ; PD.5@153.375,57.754 ccw(c152.484,57.754) 153.114,58.384 ccw(c153.744,59.014) PD.5@153.744,58.123
PD5: P12.14 PD.6 S6.2 U1.30 | length 106.9
  Top Layer w0.254: U1.30@124.887,65.015 cw(c124.677,64.805) 124.974,64.805 cw(c125.271,64.805) U1.30@125.061,65.015 ; U1.30@124.974,65.652 124.974,64.145 128.829,60.29 128.829,57.531 P12.14@127.686,56.388 ; P12.14@127.686,56.757 ccw(c127.686,57.648) 128.316,57.018 ccw(c128.946,56.388) P12.14@128.055,56.388 ; P12.14@127.686,57.011 ccw(c127.686,58.515) 128.749,57.452 ccw(c129.813,56.388) P12.14@128.309,56.388 ; S6.2@139.283,38.585 141.91,41.212 141.91,45.593 143.307,46.99 145.466,46.99 148.26,44.196 149.784,44.196 152.613,47.025 152.613,50.8 153.349,51.537 154.356,51.537 154.889,52.07 154.889,54.069 PD.6@153.744,55.214 ; S6.2@139.283,39.204 ccw(c139.283,40.698) 140.34,39.642 ; S6.2@139.283,39.458 ccw(c139.283,41.566) 140.773,40.075 ; S6.2@139.956,38.785 cw(c141.098,38.785) 140.29,39.592 ; 141.91,42.403 141.917,42.411 ; PD.6@153.744,54.591 cw(c153.744,53.087) 154.807,54.15 cw(c155.871,55.214) PD.6@154.367,55.214 ; PD.6@153.744,54.845 cw(c153.744,53.954) 154.374,54.584 cw(c155.004,55.214) PD.6@154.113,55.214
  Bottom Layer w0.254: P12.14@127.686,55.765 cw(c127.686,54.261) 128.749,55.324 cw(c129.813,56.388) P12.14@128.309,56.388 ; P12.14@127.686,56.019 cw(c127.686,55.128) 128.316,55.758 cw(c128.946,56.388) P12.14@128.055,56.388 ; P12.14@127.686,56.388 130.996,53.078 133.502,53.078 136.311,50.27 136.311,48.557 S6.2@139.283,45.585 141.348,47.65 144.704,47.65 145.618,46.736 145.618,43.155 141.249,38.786 139.283,38.786 S6.2@139.283,38.585 ; 137.793,47.075 ccw(c139.283,48.566) 139.283,46.458 ccw(c139.283,48.566) 140.773,47.075 ; 138.226,46.642 ccw(c139.283,47.698) 139.283,46.204 ccw(c139.283,47.698) 140.34,46.642 ; 138.276,46.592 cw(c137.468,45.785) S6.2@138.61,45.785 ; S6.2@139.579,38.489 cw(c140.296,37.771) 140.296,38.786 ; S6.2@139.579,39.081 ccw(c140.293,39.795) 140.293,38.786 ; S6.2@139.759,38.309 cw(c140.91,37.158) 140.91,38.786 ; S6.2@139.759,39.261 ccw(c140.906,40.408) 140.906,38.786 ; S6.2@139.956,45.785 cw(c141.098,45.785) 140.29,46.592
PD6: P12.15 PD.7 S7.2 U1.31 | length 72.7
  Top Layer w0.254: U1.31@125.687,65.015 cw(c125.477,64.805) 125.774,64.805 cw(c126.071,64.805) U1.31@125.861,65.015 ; U1.31@125.774,65.652 125.774,64.186 130.226,59.734 ; P12.15@130.069,59.531 ccw(c130.016,59.734) 130.226,59.734 ; P12.15@130.226,58.928 130.226,59.734 ; P12.15@130.383,59.531 cw(c130.435,59.734) 130.226,59.734 ; S7.2@148.459,46.261 ccw(c147.31,47.41) 148.935,47.41 ccw(c150.56,47.41) S7.2@149.411,46.261 ; S7.2@148.639,46.081 ccw(c147.923,46.797) 148.935,46.797 ccw(c149.947,46.797) S7.2@149.231,46.081 ; S7.2@148.935,45.585 148.935,47.865 PD.7@153.744,52.674
  Bottom Layer w0.254: P12.15@130.226,58.928 132.549,58.928 135.765,55.711 135.765,55.674 139.903,51.537 152.606,51.537 PD.7@153.744,52.674 ; P12.15@130.487,58.667 cw(c131.117,58.037) 131.117,58.928 cw(c131.117,59.819) P12.15@130.487,59.189 ; P12.15@130.666,58.487 cw(c131.73,57.424) 131.73,58.928 cw(c131.73,60.432) P12.15@130.666,59.369 ; S7.2@148.459,39.261 ccw(c147.285,40.435) 148.946,40.435 ; S7.2@148.459,44.909 cw(c147.285,43.735) 148.946,43.735 ; S7.2@148.639,39.081 ccw(c147.898,39.822) 148.946,39.822 ; S7.2@148.639,45.089 cw(c147.898,44.348) 148.946,44.348 ; S7.2@148.935,38.585 148.935,38.786 148.946,38.786 148.946,45.585 148.946,45.593 148.935,45.593 S7.2@148.935,45.585 ; 148.946,39.771 ccw(c149.921,39.771) S7.2@149.231,39.081 ; 148.946,40.384 ccw(c150.534,40.384) S7.2@149.411,39.261 ; 148.946,43.786 cw(c150.534,43.786) S7.2@149.411,44.909 ; 148.946,44.399 cw(c149.921,44.399) S7.2@149.231,45.089 ; PD.7@153.121,52.674 cw(c151.617,52.674) 152.68,51.61 cw(c153.744,50.547) PD.7@153.744,52.051 ; PD.7@153.375,52.674 cw(c152.484,52.674) 153.114,52.044 cw(c153.744,51.414) PD.7@153.744,52.305
PD7: P12.16 PD.8 S8.2 U1.32 | length 79
  Top Layer w0.254: U1.32@126.574,65.652 126.574,65.024 132.881,58.717 132.881,56.896 132.373,56.388 P12.16@130.226,56.388 ; U1.32@126.697,65.102 ccw(c127.182,65.102) 126.839,64.759 ; P12.16@130.487,56.127 cw(c131.117,55.497) 131.117,56.388 cw(c131.117,57.279) P12.16@130.487,56.649 ; P12.16@130.666,55.947 cw(c131.73,54.884) 131.73,56.388 cw(c131.73,57.892) P12.16@130.666,56.829 ; PD.8@153.744,50.134 154.861,50.134 ; PD.8@154.274,49.806 cw(c154.861,49.443) 154.861,50.134 ; PD.8@154.274,50.462 ccw(c154.861,50.825) 154.861,50.134 ; S8.2@157.758,46.376 ccw(c157.465,46.916) 158.079,46.916 ; S8.2@158.079,45.585 158.079,46.916 ; S8.2@158.4,46.376 cw(c158.693,46.916) 158.079,46.916 ; 154.861,50.134 158.079,46.916
  Bottom Layer w0.254: P12.16@130.226,56.388 132.182,56.388 137.443,51.127 137.443,49.552 138.125,48.87 152.479,48.87 PD.8@153.744,50.134 ; P12.16@130.487,56.127 cw(c131.117,55.497) 131.117,56.388 cw(c131.117,57.279) P12.16@130.487,56.649 ; P12.16@130.666,55.947 cw(c131.73,54.884) 131.73,56.388 cw(c131.73,57.892) P12.16@130.666,56.829 ; PD.8@153.121,50.134 cw(c151.617,50.134) 152.68,49.07 cw(c153.744,48.007) PD.8@153.744,49.511 ; PD.8@153.375,50.134 cw(c152.484,50.134) 153.114,49.504 cw(c153.744,48.874) PD.8@153.744,49.765 ; S8.2@157.603,39.261 ccw(c156.454,40.41) 158.079,40.41 ccw(c159.704,40.41) S8.2@158.555,39.261 ; S8.2@157.603,44.909 cw(c156.454,43.76) 158.079,43.76 cw(c159.704,43.76) S8.2@158.555,44.909 ; S8.2@157.783,39.081 ccw(c157.067,39.797) 158.079,39.797 ccw(c159.091,39.797) S8.2@158.375,39.081 ; S8.2@157.783,45.089 cw(c157.067,44.373) 158.079,44.373 cw(c159.091,44.373) S8.2@158.375,45.089 ; S8.2@158.079,38.585 S8.2@158.079,45.585
PE0: MAX232.12 P11.2 PE.1 R1.1 U1.2 | length 184.7
  Top Layer w0.254: P11.2@103.877,82.229 ccw(c102.814,83.292) 104.318,83.292 ccw(c105.822,83.292) P11.2@104.758,82.229 ; P11.2@104.057,82.049 ccw(c103.427,82.679) 104.318,82.679 ccw(c105.209,82.679) P11.2@104.579,82.049 ; P11.2@104.318,81.165 cw(c104.318,79.661) 105.381,80.724 cw(c106.445,81.788) P11.2@104.941,81.788 ; P11.2@104.318,81.419 cw(c104.318,80.528) 104.948,81.158 cw(c105.578,81.788) P11.2@104.687,81.788 ; U1.2@112.437,78.265 ccw(c112.227,78.055) 112.227,78.352 ccw(c112.227,78.649) U1.2@112.437,78.439 ; U1.2@113.074,78.352 111.488,78.352 109.322,80.518 105.588,80.518 P11.2@104.318,81.788 104.318,85.854 118.262,99.799 ; 118.264,99.799 118.796,100.33 v1(118.796,101.473) ; v1@118.661,101.338 cw(c118.336,101.013) 118.796,101.013 cw(c119.256,101.013) v1@118.931,101.338 ; v1@147.236,99.611 cw(c146.911,99.286) 147.371,99.286 cw(c147.831,99.286) v1@147.506,99.611 ; v1(147.371,99.746) 147.371,96.52 147.752,96.139 ; R1.1@147.905,96.018 ccw(c147.752,95.982) 147.752,96.139 ; R1.1@147.905,96.26 cw(c147.752,96.296) 147.752,96.139 ; R1.1@148.514,96.139 147.752,96.139
  Bottom Layer w0.254: MAX232.12@77.394,60.198 78.918,60.198 82.525,63.805 95.809,63.805 97.18,65.176 97.18,80.264 98.704,81.788 P11.2@104.318,81.788 ; MAX232.12@77.655,59.937 cw(c78.285,59.307) 78.285,60.198 cw(c78.285,61.089) MAX232.12@77.655,60.459 ; MAX232.12@77.834,59.757 cw(c78.898,58.694) 78.898,60.198 cw(c78.898,61.702) MAX232.12@77.834,60.639 ; P11.2@103.877,81.347 ccw(c102.814,80.284) 102.814,81.788 ccw(c102.814,83.292) P11.2@103.877,82.229 ; P11.2@104.057,81.527 ccw(c103.427,80.897) 103.427,81.788 ccw(c103.427,82.679) P11.2@104.057,82.049 ; v1@118.796,101.282 cw(c118.796,100.884) 119.078,101.166 ; v1@118.796,101.448 119.431,100.813 157.81,100.813 160.426,98.196 161.976,98.196 163.017,97.155 163.017,69.567 PE.1@161.364,67.914 ; v1@118.986,101.473 ccw(c119.508,101.473) 119.139,101.104 ; v1@147.236,99.881 ccw(c146.911,100.206) 147.371,100.206 ccw(c147.831,100.206) v1@147.506,99.881 ; v1(147.371,99.746) 147.371,100.813 ; PE.1@161.364,68.283 ccw(c161.364,69.174) 161.994,68.544 ccw(c162.624,67.914) PE.1@161.733,67.914 ; PE.1@161.364,68.537 ccw(c161.364,70.041) 162.427,68.978 ccw(c163.491,67.914) PE.1@161.987,67.914
PE1: MAX232.11 P11.3 PE.2 R3.1 U1.3 | length 204.8
  Top Layer w0.254: MAX232.11@76.771,57.658 cw(c75.267,57.658) 76.33,56.594 cw(c77.394,55.531) MAX232.11@77.394,57.035 ; MAX232.11@77.025,57.658 cw(c76.134,57.658) 76.764,57.028 cw(c77.394,56.398) MAX232.11@77.394,57.289 ; MAX232.11@77.394,57.658 76.124,56.388 76.124,44.552 76.632,44.044 83.744,44.044 92.507,52.807 92.507,54.864 93.624,55.982 96.19,55.982 99.466,59.258 99.466,73.431 102.159,76.124 102.159,78.486 103.175,79.502 103.175,86.233 v1(117.246,100.305) ; 103.175,80.391 104.774,80.391 105.917,79.248 ; 104.052,80.391 104.064,80.379 104.786,80.379 ; P11.3@106.284,79.005 ccw(c105.917,78.85) 105.917,79.248 ; P11.3@106.284,79.491 cw(c105.917,79.646) 105.917,79.248 ; P11.3@106.858,78.625 cw(c106.858,77.121) 107.921,78.184 cw(c108.985,79.248) P11.3@107.481,79.248 ; P11.3@106.858,78.879 cw(c106.858,77.988) 107.488,78.618 cw(c108.118,79.248) P11.3@107.227,79.248 ; U1.3@112.437,77.465 ccw(c112.227,77.255) 112.227,77.552 ccw(c112.227,77.849) U1.3@112.437,77.639 ; U1.3@113.074,77.552 108.554,77.552 P11.3@106.858,79.248 105.917,79.248 ; v1@117.056,100.305 cw(c116.596,100.305) 116.921,99.979 cw(c117.246,99.654) v1@117.246,100.114 ; R3.1@155.764,95.769 cw(c154.871,94.876) 156.134,94.876 cw(c157.396,94.876) R3.1@156.504,95.769 ; R3.1@156.244,96.15 ccw(c156.575,96.492) 156.912,96.155 ; R3.1@156.421,96.332 ccw(c156.755,96.677) 157.094,96.338 ; R3.1@156.598,96.515 ccw(c156.935,96.862) 157.277,96.52 ; R3.1@156.743,96.018 cw(c156.896,95.982) 156.896,96.139 ; R3.1@156.743,96.26 ccw(c156.896,96.296) 156.896,96.139 ; v1@157.015,99.56 cw(c156.383,98.928) 157.277,98.928 ; v1(157.15,99.695) 157.277,99.568 157.277,96.52 ; PE.2@160.923,64.933 ccw(c159.86,63.87) 159.86,65.374 ccw(c159.86,66.878) PE.2@160.923,65.815 ; PE.2@161.103,65.113 ccw(c160.473,64.483) 160.473,65.374 ccw(c160.473,66.265) PE.2@161.103,65.635 ; PE.2@161.364,65.374 159.467,65.374 156.134,68.707 R3.1@156.134,96.139 156.896,96.139 ; 156.896,96.139 157.277,96.52
  Bottom Layer w0.254: v1(117.246,100.305) 142.824,100.305 144.551,98.577 156.032,98.577 v1(157.15,99.695) ; v1@117.381,100.17 cw(c117.706,99.845) 117.706,100.305 cw(c117.706,100.765) v1@117.381,100.439 ; v1@156.959,99.695 cw(c156.499,99.695) 156.825,99.37 cw(c157.15,99.045) v1@157.15,99.504
PE2: P11.4 PE.3 U1.4 | length 131.9
  Top Layer w0.254: P11.4@103.695,79.248 cw(c102.191,79.248) 103.254,78.184 cw(c104.318,77.121) 104.318,78.625 cw(c104.318,77.121) 105.381,78.184 cw(c106.445,79.248) P11.4@104.941,79.248 ; P11.4@103.949,79.248 cw(c103.058,79.248) 103.688,78.618 cw(c104.318,77.988) 104.318,78.879 cw(c104.318,77.988) 104.948,78.618 cw(c105.578,79.248) P11.4@104.687,79.248 ; v1@111.041,51.427 cw(c110.716,51.102) 111.176,51.102 cw(c111.636,51.102) v1@111.311,51.427 ; v1(111.176,51.562) 111.176,51.054 109.381,49.259 103.7,49.259 102.159,50.8 102.159,72.401 101.548,73.012 101.548,74.56 102.667,75.679 102.667,77.597 P11.4@104.318,79.248 105.588,77.978 107.213,77.978 108.439,76.752 U1.4@113.074,76.752 ; U1.4@112.437,76.665 ccw(c112.227,76.455) 112.227,76.752 ccw(c112.227,77.049) U1.4@112.437,76.839 ; v1(134.772,49.225) 144.45,58.903 150.063,58.903 152.603,61.443 155.346,61.443 156.005,60.784 156.005,58.928 156.877,58.056 v1(158.564,58.056) ; v1@134.772,49.416 ccw(c134.772,49.876) 135.098,49.55 ccw(c135.423,49.225) v1@134.963,49.225 ; v1@158.43,57.922 ccw(c158.104,57.597) 158.104,58.056 ccw(c158.104,58.516) v1@158.43,58.191
  Bottom Layer w0.254: v1(111.176,51.562) 111.886,52.272 117.32,52.272 118.249,51.343 122.313,51.343 122.786,51.816 132.182,51.816 v1(134.772,49.225) ; v1@111.176,51.752 ccw(c111.176,52.212) 111.501,51.887 ccw(c111.826,51.562) v1@111.366,51.562 ; v1@134.582,49.225 ccw(c134.122,49.225) 134.447,49.55 ccw(c134.772,49.876) v1@134.772,49.416 ; v1(158.564,58.056) 159.41,58.903 161.976,58.903 162.509,59.436 162.509,61.689 PE.3@161.364,62.834 ; v1@158.564,58.247 ccw(c158.564,58.707) 158.889,58.382 ccw(c159.215,58.056) v1@158.755,58.056 ; PE.3@161.364,62.211 cw(c161.364,60.707) 162.427,61.77 cw(c163.491,62.834) PE.3@161.987,62.834 ; PE.3@161.364,62.465 cw(c161.364,61.574) 161.994,62.204 cw(c162.624,62.834) PE.3@161.733,62.834
PE3: P11.5 PE.4 U1.5 | length 88.8
  Top Layer w0.254: P11.5@106.858,76.708 107.614,75.952 ; P11.5@107.024,76.108 cw(c107.185,75.524) 107.614,75.952 ; P11.5@107.458,76.542 ccw(c108.042,76.38) 107.614,75.952 ; U1.5@112.437,75.865 ccw(c112.227,75.655) 112.227,75.952 ccw(c112.227,76.249) U1.5@112.437,76.039 ; U1.5@113.074,75.952 107.614,75.952
  Bottom Layer w0.254: P11.5@106.858,76.708 107.213,76.352 122.987,76.352 124.028,75.311 140.31,75.311 140.564,75.565 142.557,75.565 143.928,74.193 147.498,74.193 150.038,76.733 156.642,76.733 158.709,74.666 158.709,63.476 159.842,62.342 159.842,62.332 161.364,60.81 PE.4@161.364,60.294 ; P11.5@106.939,76.789 ccw(c107.994,77.844) 107.994,76.352 ; P11.5@107.119,76.969 ccw(c108.607,78.457) 108.607,76.352 ; P11.5@107.298,77.149 ccw(c109.22,79.071) 109.22,76.352 ; 159.935,62.238 cw(c157.991,60.294) PE.4@160.741,60.294 ; 160.369,61.805 cw(c158.858,60.294) PE.4@160.995,60.294 ; 160.803,61.371 cw(c159.726,60.294) PE.4@161.249,60.294
PE4: P11.6 PE.5 U1.6 | length 118.9
  Top Layer w0.254: P11.6@104.318,76.085 cw(c104.318,74.581) 105.381,75.644 cw(c106.445,76.708) P11.6@104.941,76.708 ; P11.6@104.318,76.339 cw(c104.318,75.448) 104.948,76.078 cw(c105.578,76.708) P11.6@104.687,76.708 ; P11.6@104.318,76.708 105.588,75.438 109.544,75.438 109.83,75.152 U1.6@113.074,75.152 ; U1.6@112.437,75.065 ccw(c112.227,74.855) 112.227,75.152 ccw(c112.227,75.449) U1.6@112.437,75.239 ; v1(133.147,70.485) 133.274,70.358 138.125,70.358 144.247,64.237 147.038,64.237 151.181,68.379 151.181,80.264 152.806,81.89 154.432,81.89 155.448,80.874 155.448,68.504 157.81,66.142 157.81,60.3 160.356,57.754 ; v1@133.282,70.62 ccw(c133.913,71.252) 133.913,70.358 ; PE.5@160.807,57.475 ccw(c160.356,57.25) 160.356,57.754 ; PE.5@160.807,58.033 cw(c160.356,58.258) 160.356,57.754 ; PE.5@161.364,57.754 160.356,57.754
  Bottom Layer w0.254: P11.6@104.318,76.085 cw(c104.318,74.581) 105.381,75.644 cw(c106.445,76.708) P11.6@104.941,76.708 ; P11.6@104.318,76.339 cw(c104.318,75.448) 104.948,76.078 cw(c105.578,76.708) P11.6@104.687,76.708 ; P11.6@104.318,76.708 105.461,75.565 117.577,75.565 118.669,74.473 132.207,74.473 133.147,73.533 v1(133.147,70.485) ; v1@133.012,70.62 ccw(c132.687,70.945) 133.147,70.945 ccw(c133.607,70.945) v1@133.282,70.62